# Altium PCB CenterBoard_Mega16.PcbDoc
Units mil, origin at the board's own origin, x right, y up, seen from the top; angles counter-clockwise.
Board outline 6000 x 4000 mil, 2 copper layers (Top Layer, Bottom Layer); 45 components, 52 nets, 229 pads, 41 vias.
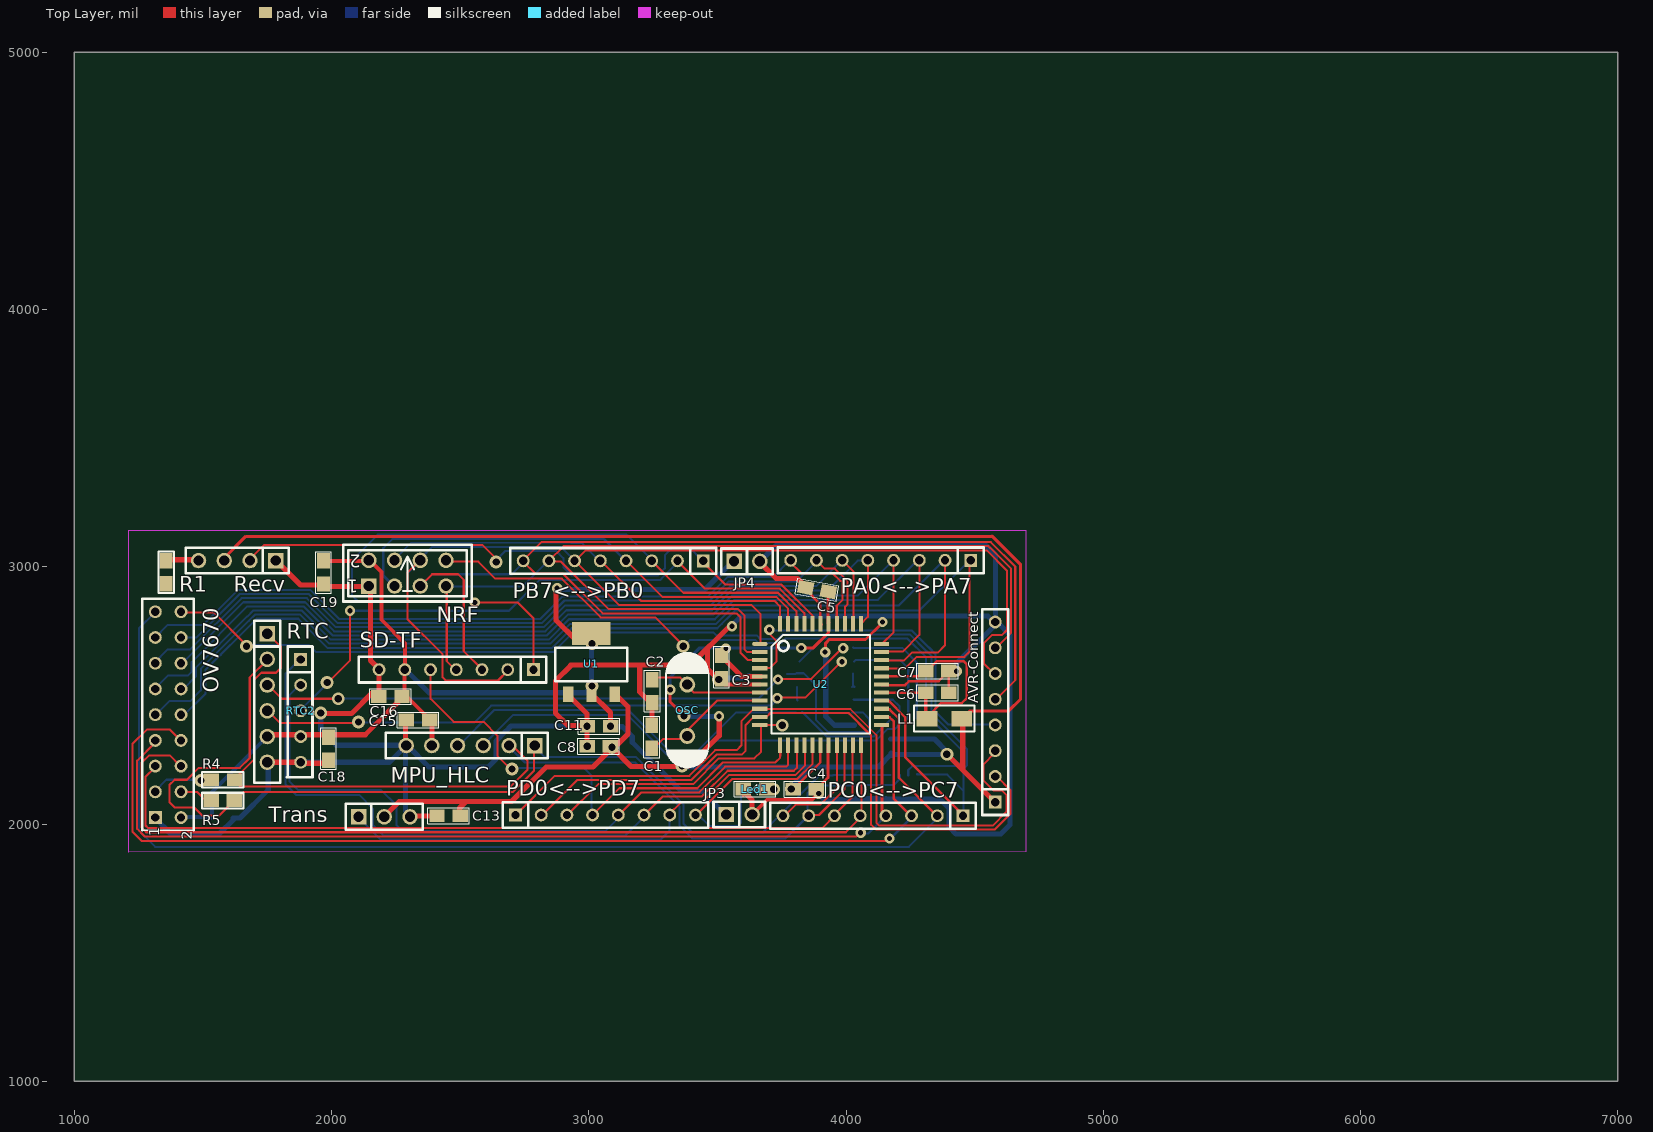
[diagram p0: Top Layer view]
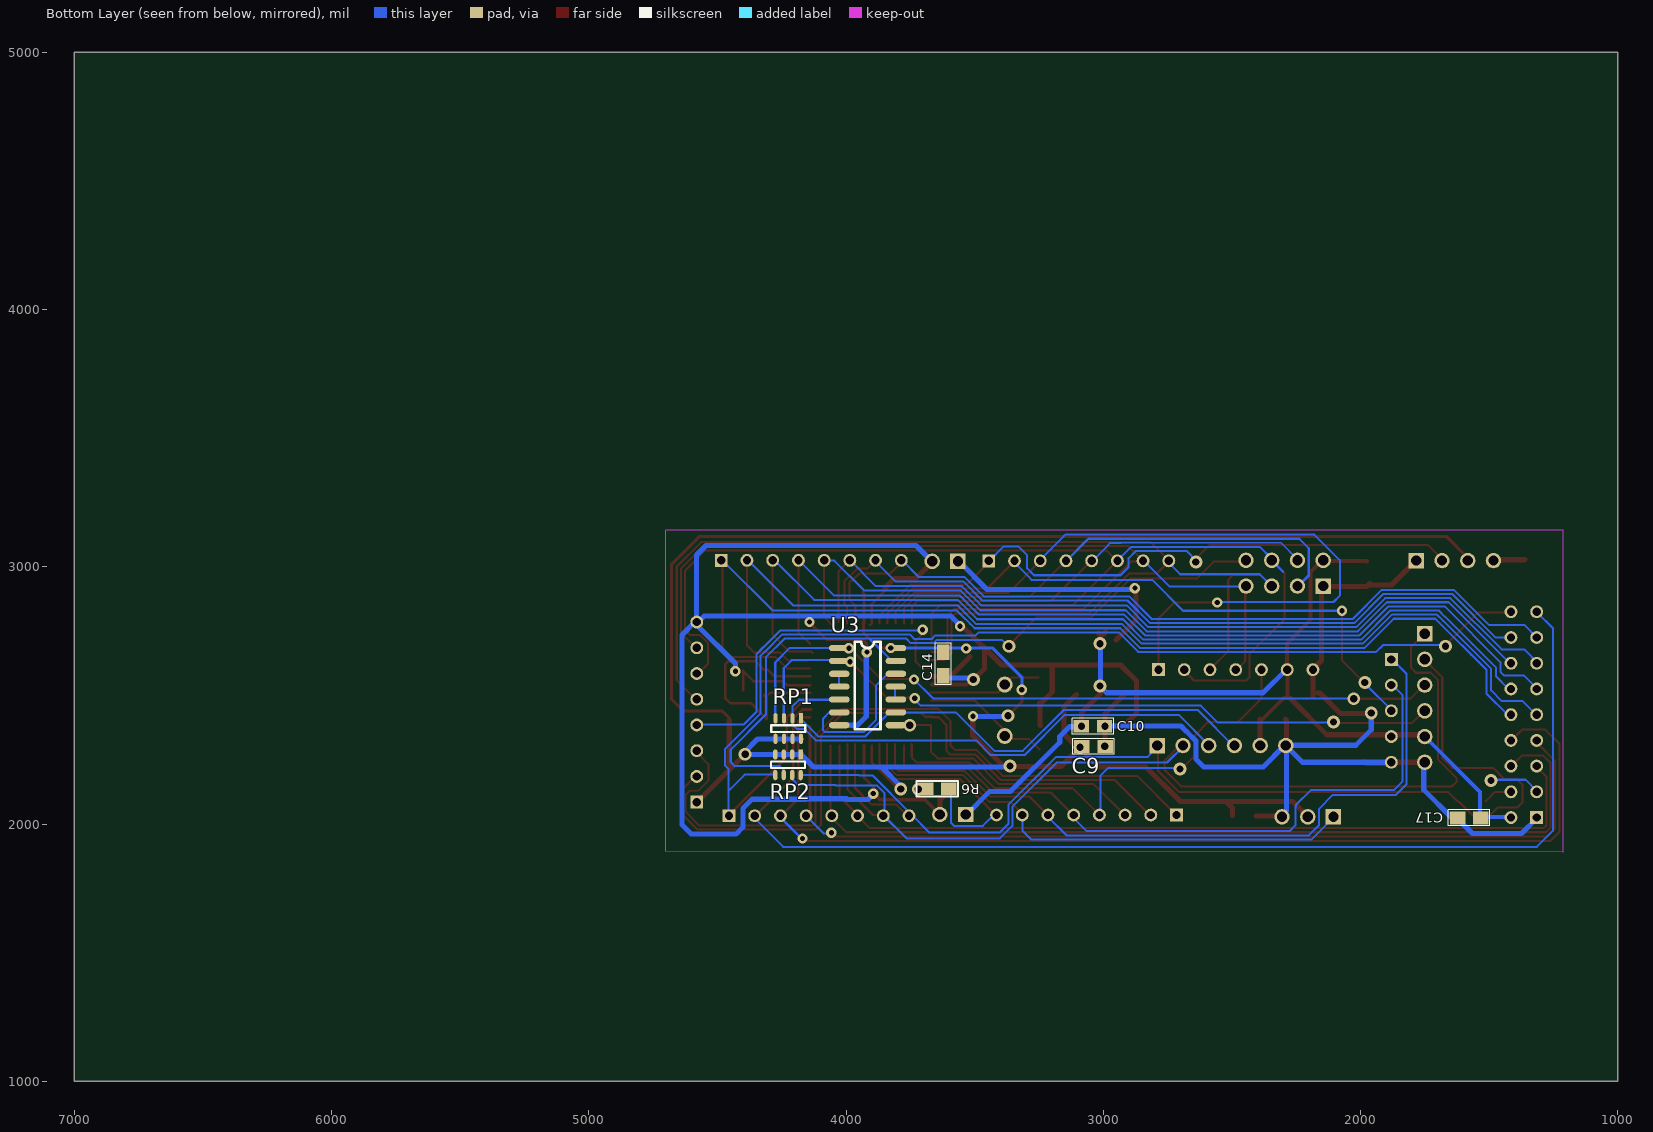
[diagram p1: Bottom Layer view, seen from below]

## Layer stack, top to bottom
Top Layer: signal copper 1.4
Dielectric: dielectric 12.6, FR-4, Dk 4.8
Bottom Layer: signal copper 1.4

## Board outline
1000,1000 7000,1000 7000,5000 1000,5000

## Design rules (kind name [scope] priority, off if disabled: settings)
Clearance [All] p1: gap=8
ComponentClearance [All] p1: gap=10 collisioncheckmode=3 verticalgap=10
PolygonConnect [All] p1: connectstyle=Relief reliefconductorwidth=10 reliefentries=4 polygonreliefangle="90 Angle"
RoutingVias [All] p1: holewidth=20 width=40 viastyle="Through Hole" minholewidth=20 minwidth=40 maxholewidth=28 maxwidth=50
SolderMaskExpansion [All] p1: expansion=4
TestPointUsage [All] p1: valid=0 allowmultiple=FALSE
Testpoint [All] p1: side=15 testpointundercomponent=TRUE minsize=40 maxsize=100 preferedsize=60 minholesize=0 maxholesize=40 preferedholesize=32 testpointgrid=1 style=1023 order=0-112345678
Width [All] p1: maxlimit=20 minlimit=6 preferedwidth=10 toplayer_prefwidth=8 bottomlayer_prefwidth=8 minimp=50.000000 maximp=50.000000 favimp=50.000000
18 further rules are at their usual default settings.

## Components (designator, comment, footprint, x,y, rotation, side; value= is the part's Value field where it differs from the comment)
AVR-Connect "8PIN" SIP8 4580,2085 r90 top
C1 "CAPA" RC100 3255,2374 r270 top
C2 "CAPA" RC100 3237,2481 r90 top
C3 "CAPA" RC100 3526,2645 r270 top
C4 "CAPA" RC100 3805,2145 r0 top
C5 "CAPA" RC100 3920,2895 r170 top
C6 "CAPA" RC100 4320,2520 r0 top
C7 "CAPA" RC100 4320,2605 r0 top
C8 "CAPA" RC100 3074,2292 r180 top
C9 "CAPA" RC100 3073,2311 r180 bottom
C10 "CAPA" RC100 3075,2390 r180 bottom
C11 "CAPA" RC100 3075,2370 r180 top
C13 "CAPA" RC100 2490,2022 r180 top
C14 "CAPA" RC100 3612,2657 r270 bottom
C15 "CAPA" RC100 2371,2394 r180 top
C16 "CAPA" RC100 2264,2486 r180 top
C17 "CAPA" RC100 1542,2014 r0 bottom
C18 "CAPA" RC100 1978,2258 r90 top
C19 "CAPA" RC100 1959,2943 r90 top
JP3 "2PIN" SIP2 3535,2037 r0 top
JP4 "2PIN" SIP2 3565,3021 r0 top
L1 "LH" 1206 4450,2410 r180 top
Led1 "LED" LED 3641,2051 r180 top
MPU_HLC "6PIN" SIP6 2790,2305 r180 top
NRF "NRF2401" NRF2401 2145,2925 r180 top
OSC "CRYSTAL" OSC200 3383,2542 r90 top
OV7670 "OV7670-K" SIP9X2 1315,2025 r90 top
PA0<-->PA7 "8PIN" SIP8 4485,3025 r180 top
PB7<-->PB0 "8PIN" SIP8 3445,3023 r180 top
PC0<-->PC7 "8PIN" SIP8 4455,2032 r180 top
PD0<-->PD7 "8PIN" SIP8 2715,2035 r0 top
R1 "RES2A" 0805 1362,2974 r90 top
R4 "RES2A" 0805 1573,2167 r0 top
R5 "RES2A" 0805 1582,2096 r180 top
R6 "RES2A" 0805 3650,2132 r180 bottom
Recv "4PIN" SIP4 1783,3024 r180 top
RP1 "RESPACK4" RN4 4175,2411 r270 bottom
RP2 "RESPACK4" RN4 4176,2270 r270 bottom
RTC "6PIN" SIP6 1750,2740 r270 top
RTC2 "5PIN" SIP5 1880,2640 r270 top
SD-TF "7PIN" SIP7 2785,2600 r180 top
Trans "3PIN" SIP3 2105,2028 r0 top
U1 "VOTAGE_V33" SOT-223 2920,2505 r0 top
U2 "ATMEGA16A_TQFP44" TQFP-44 3665,2700 r0 top
U3 "74HC08" SO-14 4026,2684 r180 bottom

## Footprints (in the part's own frame and the unit in brackets; to place one, negate y for a bottom-side part, rotate by r counter-clockwise, add the part's x,y. Pads: shape width x height; smd on the part's side, far side on the other; paste and mask are expansions set on the pad)
0805 [mil]
  rect 60x50 smd: 1(50,5) 2(-40,5)
  silkscreen extent -76,-26 85,36
1206 [mil]
  rect 80x60 smd: 1(0,0) 2(135,0)
  silkscreen extent -50,-50 185,50
LED [mil]
  rect 60x50 smd: A(-50,-85) K(40,-85)
  silkscreen extent -86,-116 75,-54
NRF2401 [mil]
  rect 60x60 hole 40: 1(0,0)
  round 60 hole 40: 2(0,-100) 3(-100,0) 4(-100,-100) 5(-200,0) 6(-200,-100) 7(-300,0) 8(-300,-100)
  silkscreen extent -400,-160 100,60
OSC200 [mil]
  round 62 hole 40: 1(0,0) 2(-200,0)
  silkscreen extent -323,-83 124,83
RC100 [mil]
  rect 60x50 smd: 1(-10,-10) 2(80,-10)
  silkscreen extent -45,-41 116,21
RN4 [mil]
  rect 40x16 smd: 1(0,0)
  oval 40x16 smd: 2(0,-33) 3(0,-66) 4(0,-99) 5(80,-99) 6(80,-66) 7(80,-33) 8(80,0)
  silkscreen extent 27,-116 53,16
SIP2 [mil]
  rect 60x60 hole 40: 1(0,0)
  round 60 hole 40: 2(100,0)
  silkscreen extent -50,-50 150,50
SIP3 [mil]
  rect 60x60 hole 40: 1(0,0)
  round 60 hole 40: 2(100,0) 3(200,0)
  silkscreen extent -50,-50 250,50
SIP4 [mil]
  rect 60x60 hole 40: 1(0,0)
  round 60 hole 40: 2(100,0) 3(200,0) 4(300,0)
  silkscreen extent -50,-50 350,50
SIP5 [mil]
  rect 50x50 hole 32: 1(0,0)
  round 50 hole 32: 2(100,0) 3(200,0) 4(300,0) 5(400,0)
  silkscreen extent -50,-53 459,47
SIP6 [mil]
  rect 60x60 hole 40: 1(0,0)
  round 60 hole 40: 2(100,0) 3(200,0) 4(300,0) 5(400,0) 6(500,0)
  silkscreen extent -50,-50 580,50
SIP7 [mil]
  rect 50x50 hole 32: 1(0,0)
  round 50 hole 32: 2(100,0) 3(200,0) 4(300,0) 5(400,0) 6(500,0) 7(600,0)
  silkscreen extent -50,-50 680,50
SIP8 [mil]
  rect 50x50 hole 32: 1(0,0)
  round 50 hole 32: 2(100,0) 3(200,0) 4(300,0) 5(400,0) 6(500,0) 7(600,0) 8(700,0)
  silkscreen extent -50,-50 750,50
SIP9X2 [mil]
  rect 50x50 hole 32: 1(0,0)
  round 50 hole 32: 2(0,-100) 3(100,0) 4(100,-100) 5(200,0) 6(200,-100) 7(300,0) 8(300,-100) 9(400,0) 10(400,-100) 11(500,0) 12(500,-100) 13(600,0) 14(600,-100) 15(700,0) 16(700,-100) 17(800,0) 18(800,-100)
  silkscreen extent -50,-150 850,50
SO-14 [mil]
  oval 80x24 smd: 1(0,0) 2(0,-50) 3(0,-100) 4(0,-150) 5(0,-200) 6(0,-250) 7(0,-300) 8(220,-300) 9(220,-250) 10(220,-200) 11(220,-150) 12(220,-100) 13(220,-50) 14(220,0)
  silkscreen extent 60,-315 160,25
SOT-223 [mil]
  rect 40x60 smd: 1(0,0) 2(90.55,0) 3(181.1,0)
  rect 150x90 smd: 4(90,235)
  silkscreen extent -50,50 230,180
TQFP-44 [mm]
  oval 1.5x0.4 smd: 1(0,0)
  rect 1.5x0.4 smd: 2(0,-0.8) 3(0,-1.6) 4(0,-2.4) 5(0,-3.2) 6(0,-4) 7(0,-4.8) 8(0,-5.6) 9(0,-6.4) 10(0,-7.2) 11(0,-8) 23(12,-8) 24(12,-7.2) 25(12,-6.4) 26(12,-5.6) 27(12,-4.8) 28(12,-4) 29(12,-3.2) 30(12,-2.4) 31(12,-1.6) 32(12,-0.8) 33(12,0)
  rect 0.4x1.5 smd: 12(2,-10) 13(2.8,-10) 14(3.6,-10) 15(4.4,-10) 16(5.2,-10) 17(6,-10) 18(6.8,-10) 19(7.6,-10) 20(8.4,-10) 21(9.2,-10) 22(10,-10) 34(10,2) 35(9.2,2) 36(8.4,2) 37(7.6,2) 38(6.8,2) 39(6,2) 40(5.2,2) 41(4.4,2) 42(3.6,2) 43(2.8,2) 44(2,2)
  silkscreen extent 1.13,-8.87 10.87,0.87

## Part data
U2: library part AT90S8535_TQFP44, "Atmel Microcontroller - Library created by carel..  <www.mpfreezone.com>"

## Via types
v1: diameter 50, hole 28, Top Layer to Bottom Layer, 22 vias
v2: diameter 40, hole 20, Top Layer to Bottom Layer, 19 vias

## Nets (pads, with @x,y where several pads share a name; then routed paths per layer and width w, separated by ;. In a path a pad name is that pad's centre, name@x,y a point inside that pad or via, vN(x,y) a via of type N, cw(c..) or ccw(c..) an arc to the next point about the centre after c; other vN are vias at no path point)
ANT: R1.2
AVCC: C6.1 C7.1 L1.2 U2.27 U2.29 | length 917.5
  Top Layer w10: U2.27@4140,2510 4295,2510 C6.1@4300,2505 ; U2.29@4140,2575 4280,2575 C7.1@4305,2600 ; C7.1@4310,2600 4320,2600 4353,2633 4457,2633 4470,2620 4470,2490 4450,2470 4370,2470 L1.2@4320,2420
  Top Layer w15: L1.2@4310,2410 4310,2495 C6.1@4315,2500
DRDY: MPU_HLC.3 RP1.2 U3.5 | length 2043.8
  Bottom Layer w8: MPU_HLC.3@2587,2304 2707,2424 3150,2424 3306,2268 3437,2268 3494,2325 4117,2325 4162,2370 4191,2370 4208,2387 4208,2457 4182,2483 4031,2483 U3.5@4030,2484
GND: AVR-Connect.8 C1.1 C2.1 C3.2 C4.2 C5.2 C6.2 C7.2 C8.2 C9.2 C10.2 C11.2 C13.2 C14.2 C15.2 C16.2 C17.2 C18.1 C19.1 JP3.2 JP4.2 Led1.K MPU_HLC.6 NRF.1 OV7670.1 Recv.1 RTC2.5 RTC.6 SD-TF.7 Trans.3 U1.1 U2.6 U2.18 U2.28 U2.39 U3.7 | length 12423.3
  Top Layer w10: 3601,2110 Led1.K@3601,2134 ; C5.2@3840,2915 3899.54,2855.46 3899.54,2780.46 U2.39@3905,2775 ; C4.2@3880,2130 C4.2@3880.5,2130.5 ; C4.2 3930,2180 U2.18@3930,2306.3 ; U2.28@4140,2540 4230,2540 4245,2555 4360,2555 C7.2 C6.2@4400,2520
  Top Layer w12: v2@3921,2667 3921,2703 3935,2717 4076,2717 v2@4136,2777
  Top Layer w15: C3.2@3514,2561 3532,2543 U2.6@3666,2543 ; JP3.2@3634,2036 3692.5,2094.5 3868.5,2094.5 3885,2111 C4.2@3885,2132
  Top Layer w20: RTC.6 1881,2240 RTC2.5@1884,2237 ; Recv.1@1786,3022 1879,2929 C19.1@1969,2929 ; RTC2.5@1878,2236 1978,2236 C18.1@1985,2243 ; v1@1958,2429 2077.43,2429 2157.43,2509 C16.2@2166,2509 ; C19.1@1964,2935 1976,2923 NRF.1@2150,2923 ; NRF.1@2152,2923 2152,2636 SD-TF.7@2188,2600 ; C16.2 SD-TF.7@2184,2601 ; MPU_HLC.6@2287,2305 2287,2402 C15.2@2292,2407 ; Trans.3@2315,2033 2317,2031 C13.2@2406,2031 ; 2870,2555.4 2932.6,2618 ; 2870,2556 2870,2432 2919,2383 2989,2383 2990,2384 C11.2@2986,2384 ; U1.1@2918.5,2503.5 2993,2429 C11.2@2993,2382 ; 2930,2618 3396,2618 3550,2772 3558,2772 3559,2771 3560,2771 v2@3561,2770 ; C8.2@2993,2302 v1(2993,2380) ; 3198,2618 3198,2513 3240,2471 C2.1 ; C1.1@3244,2383 3246,2385 C2.1@3246,2467 ; 3461,2684 3461,2604 C3.2@3502,2563 ; Led1.K@3600,2129 3634,2095 JP3.2@3634,2037 ; JP4.2@3667,3015 3668,3015 3728,2955 3811,2955 C5.2@3848,2918
  Bottom Layer w8: SD-TF.7@2188,2605 SD-TF.7@2188,2607
  Bottom Layer w20: OV7670.1@1308,2022 1315,2022 1374,1963 1565,1963 C17.2@1620,2018 ; OV7670.1@1315,2027 OV7670.1@1318,2027 ; C17.2@1618,2023 1644,2023 1754,2133 1754,2237 RTC.6@1750,2241 ; RTC2.5 2225,2240 MPU_HLC.6@2292,2307 ; v1(1958,2431) 1958,2366 2018,2306 MPU_HLC.6@2294,2306 ; MPU_HLC.6@2286,2305 2295,2305 2378,2222 2609,2222 2639,2252 2639,2323 2675,2359 2676,2359 2698,2381 2993,2381 C10.2@2994,2380 ; MPU_HLC.6@2298,2287 2298,2297 2287,2308 2287,2050 Trans.3@2300,2037 ; v1@3498,2567 3612,2567 C14.2 ; v2@3555,2771 3592,2808 4552,2808 AVR-Connect.8@4579,2781 ; JP4.2@3662,3017 3728,3083 4544,3083 4581,3046 4581,2775 4430,2624 4430,2595 v2@4431,2594 ; v2@3890,2120 3915,2095 3998,2095 ; v2@3920,2672 3921,2671 3921,2418 3955,2384 U3.7@4032,2384 ; 3997,2096 3999,2098 4156,2098 ; 4156,2096 4365,2096 4401,2060 4401,1987 4427,1961 4602,1961 4638,1997 4638,2735 4588,2785 AVR-Connect.8@4581,2785
  other v1: 2994,2302 3505,2562
  other v2: 3894,2118 4430,2594 3919,2668 3557,2769 4142,2785
INT2401: NRF.8 RP2.6 U3.13 | length 2882.6
  Top Layer w8: NRF.8@2444,3020 2571,3020 2637,2954 2895,2954 3046,2803 ; 3047,2803 3259,2803 v1@3368,2694
  Bottom Layer w8: v1@3370,2692 3394,2716 3646,2716 ; 3647,2716 3660,2703 3748,2703 3766,2721 4238,2721 4311.5,2647.5 ; U3.13@3819,2631 3909,2721 ; RP2.6@4242,2188 4242,2210 4257,2225 4432,2225 4448,2241 4448,2289 4311,2426 4311,2647
  other v1: 3367,2691
INT6050: MPU_HLC.4 RP1.1 U3.9 | length 1921.2
  Bottom Layer w8: MPU_HLC.4@2488,2299 2632,2443 3153.63,2443 3312.63,2284 3423,2284 3573,2434 U3.9 ; U3.9@3829,2436 3924,2341 4109,2341 ; 4108,2341 RP1.1@4176,2409
INTA: RP1.3 RTC.4 U3.2 | length 2771.9
  Top Layer w8: RTC.4@1751,2437 1756,2437 1801,2392 2102,2392 v1@2105,2395 ; v2@3735,2492 3843,2492 v2@3983,2632
  Bottom Layer w8: v1@2108,2395 2109,2394 2556,2394 ; 2555,2394 2621,2460 3709,2460 3734,2485 v2@3734,2489 ; U3.2@4032,2632 4037,2637 4211,2637 4242,2606 RP1.3@4242,2408
  other v1: 2105,2396
  other v2: 3733,2489 3984,2631
INTB: RP1.4 RTC.3 U3.1 | length 2841.9
  Top Layer w8: RTC.3 1754,2540 1807,2487 2028,2487 v1@2031,2490 ; v2@3735,2564 3865,2564 v2@3989,2688
  Bottom Layer w8: v1@2026,2488 3661,2488 v2@3738,2565 ; U3.1@4028,2687 4030,2685 4218,2685 4275,2628 RP1.4@4275,2411
  other v1: 2026,2487
  other v2: 3736,2562 3989,2683
INTR: U3.3 U3.4 | length 53.7
  Bottom Layer w8: U3.4@4024,2533 4027,2536 U3.3@4027,2584 ; U3.4@4032,2533 U3.4@4033,2534
INTRS: U3.10 U3.11 | length 53.2
  Bottom Layer w8: U3.11@3809,2533 3809,2484 U3.10@3812,2481
INTS: U3.6 U3.12 | length 611.2
  Bottom Layer w8: U3.12@3770,2583 U3.12@3803,2583 ; U3.12@3808,2587 3809,2586 3835,2586 3883.63,2537.37 3883.63,2404 3930.63,2357 3933,2357 4082,2357 4089,2364 4089,2410 4065,2434 U3.6@4024,2434
NetC1_2: C1.2 OSC.2 U2.8 | length 502.7
  Top Layer w8: C1.2@3248.5,2290.5 3288,2330 OSC.2@3382,2330 ; OSC.2@3370,2350 3500,2480 U2.8@3669,2480
NetC2_2: C2.2 OSC.1 U2.7 | length 443.5
  Top Layer w8: C2.2@3251,2569 3356,2569 OSC.1 ; OSC.1@3382,2537 3407,2512 U2.7@3672,2512
NetLed1_A: Led1.A R6.2
  other v1: 3719,2135
NetOV7670_3: OV7670.3 R4.2 | length 206.2
  Top Layer w8: OV7670.3 OV7670.3@1328,2125
  Bottom Layer w8: OV7670.3@1314,2128 1358,2172 v1@1489,2172
  other v1: 1493,2169
NetOV7670_4: OV7670.4 R5.1 | length 116.9
  Top Layer w8: OV7670.4@1411,2125 1477,2125 R5.1@1513,2089
NetR1_1: R1.1 Recv.4 | length 125.4
  Top Layer w20: R1.1@1361,3028 1362,3027 Recv.4@1486,3027
PA0: OV7670.15 PA0<-->PA7.8 U2.37 | length 3081.1
  Top Layer w8: PA0<-->PA7.8@3782,3020 3828,2974 3948,2974 3977,2945 3981,2945 3987,2939 3987,2872 3964,2849 3964,2794 U2.37@3962,2792
  Bottom Layer w8: OV7670.15@1316,2727 1362,2773 1500.12,2773 1637.12,2910 1917.39,2910 2030.39,2797 2810.98,2797 2898.98,2885 3464.11,2885 3540.11,2961 3718,2961 3780,3023 PA0<-->PA7.8@3785,3023
PA1: OV7670.16 PA0<-->PA7.7 U2.36 | length 3005.2
  Top Layer w8: PA0<-->PA7.7@3886,3025 3918,2993 3957,2993 4005,2945 4005,2853 3996,2844 U2.36@3996,2780
  Bottom Layer w8: OV7670.16@1417,2726 1417.37,2725.63 1475.37,2725.63 1643.75,2894 1910.76,2894 2023.76,2781 2817.61,2781 2905.61,2869 3470.74,2869 3544.74,2943 3808,2943 3884,3019 PA0<-->PA7.7@3884,3021
PA2: OV7670.13 PA0<-->PA7.6 U2.35 | length 3193.5
  Top Layer w8: PA0<-->PA7.6 4030,2980 U2.35@4030,2785
  Bottom Layer w8: OV7670.13@1309,2624 1363.63,2678.63 1451,2678.63 1650.37,2878 1904.14,2878 2017.14,2765 2824.24,2765 2909.24,2850 3474.37,2850 3549.37,2925 3884,2925 3982,3023 PA0<-->PA7.6@3985,3023
PA3: OV7670.14 PA0<-->PA7.5 U2.34 | length 3178.5
  Top Layer w8: U2.34@4055,2775 4085,2805 PA0<-->PA7.5@4085,3020
  Bottom Layer w8: OV7670.14@1422,2627 1657,2862 1897.51,2862 2010.51,2749 2830.86,2749 2912.86,2831 3477.99,2831 3553.99,2907 3928,2907 4045,3024 PA0<-->PA7.5@4085,3024
PA4: OV7670.11 PA0<-->PA7.4 U2.33 | length 3531.1
  Top Layer w8: U2.33@4140,2700 4185,2745 PA0<-->PA7.4@4185,3020
  Bottom Layer w8: OV7670.11@1314,2527 1364,2577 1441,2577 1456,2592 1456,2629 1673,2846 1890.88,2846 2003.88,2733 2578,2733 ; 2579,2733 2837.49,2733 2919.49,2815 3485,2815 3526,2856 ; 3525.81,2856.19 3558.62,2889 4047,2889 PA0<-->PA7.4@4185,3027
PA5: OV7670.12 PA0<-->PA7.3 U2.32 | length 3657.2
  Top Layer w8: U2.32@4130,2665 4135,2670 4220,2670 4285,2735 PA0<-->PA7.3
  Bottom Layer w8: OV7670.12@1423,2524 1473,2574 1473,2607 ; 1472.69,2607.31 1564,2698.63 1564,2699 1671,2806 1671.75,2806 1695.75,2830 1884.25,2830 1997.25,2717 2844.12,2717 2923.12,2796 3490,2796 3564,2870 4123,2870 4127,2874 4127,2875 4274,3022 PA0<-->PA7.3@4286,3022
PA6: OV7670.9 PA0<-->PA7.2 U2.31 | length 4054.7
  Top Layer w8: U2.31@4145,2635 4225,2635 4256,2666 4356,2666 4385,2695 PA0<-->PA7.2@4385,3020
  Bottom Layer w8: OV7670.9@1314,2422 1369.63,2477.63 1450,2477.63 1492,2519.63 1492,2604 1678,2790 1678.37,2790 1702.37,2814 1877.63,2814 1990.63,2701 2850.75,2701 2926.75,2777 3493.63,2777 3566.63,2850 4206,2850 4381,3025 PA0<-->PA7.2@4386,3025
PA7: OV7670.10 PA0<-->PA7.1 U2.30 | length 4177.7
  Top Layer w8: U2.30@4140,2605 4230,2605 4275,2650 4460,2650 4480,2670 4480,3020 PA0<-->PA7.1
  Bottom Layer w8: OV7670.10@1428,2424 1510,2506 1510,2599 1709,2798 1871,2798 1984,2685 2608.37,2685 ; 1569,2658 1570,2658 ; 2609,2685 2857.37,2685 2933.37,2761 3500.25,2761 3569.25,2830 4285,2830 4479,3024 PA0<-->PA7.1@4484,3024 ; 3516.25,2777 3517,2777
PB0: PB7<-->PB0.1 Recv.2 U2.40 | length 2554.3
  Top Layer w8: Recv.2@1677,3024 1738,3085 2586,3085 2642,3029 v1@2642,3020 ; Recv.2@1684,3028 Recv.2@1684,3035 ; Recv.2@1687,3027 Recv.2@1687,3028 ; PB7<-->PB0.1@3444,3018 3531,2931 3749,2931 3870,2810 U2.40@3870,2780
  Bottom Layer w8: v1@2637,3022 2676.5,3061.5 2872.5,3061.5 2901,3033 2901,2999 2933,2967 3269,2967 3296,2994 3296,3044 3331,3079 3387,3079 PB7<-->PB0.1@3444,3022
  other v1: 2640,3019
PB1: PB7<-->PB0.2 RTC2.3 U2.41 | length 2446.1
  Top Layer w8: v1@1979,2544 2072,2637 v2(2072,2829) ; PB7<-->PB0.2@3345,3022 3452,2915 3742.37,2915 3838,2819.37 U2.41@3838,2782 ; U2.41@3840,2780 U2.41@3840,2782
  Bottom Layer w8: RTC2.3@1878.5,2441.5 v1@1985,2548 ; v2@2074,2829 2690,2829 2810,2949 3279,2949 3282,2952 3282,2953 3344,3015 PB7<-->PB0.2@3344,3023
  other v1: 1983,2550
PB2: PB7<-->PB0.3 SD-TF.1 U2.42 | length 3028.3
  Top Layer w8: v2(2557,2861) 2724,2861 2785,2800 2785,2599 SD-TF.1@2788,2596 ; PB7<-->PB0.3@3244,3023 3368,2899 3735.75,2899 3807,2827.75 U2.42@3807,2781 ; U2.42@3805,2780 U2.42@3805,2781
  Bottom Layer w8: v2@2558,2863 2105,2863 2080,2888 2080,3026 2179,3125 3147,3125 PB7<-->PB0.3@3248,3024 ; 3151,3121 3152,3121
PB3: NRF.3 PB7<-->PB0.4 U2.43 | length 2262.1
  Top Layer w8: PB7<-->PB0.4@3147,3022 3286,2883 3729.12,2883 3775,2837.12 U2.43@3775,2780
  Bottom Layer w8: 2201,3049 2201,2968 NRF.3@2245,2924 ; NRF.3@2243,2923 2242,2923 2201,2964 2201,3072 2238,3109 3057,3109 3060,3106 3061,3106 3143,3024 PB7<-->PB0.4@3145,3024 ; 2905.63,3109 2979.63,3109 ; 3061,3105 PB7<-->PB0.4@3147,3019
PB4: NRF.4 PB7<-->PB0.5 U2.44 | length 1691.2
  Top Layer w8: PB7<-->PB0.5@3049,3022 3204,2867 3722.49,2867 3743,2846.49 U2.44@3743,2779 ; U2.44@3743,2780 U2.44@3745,2780
  Bottom Layer w7: NRF.4@2246,3030 2309,3093 2932,3093
  Bottom Layer w8: 2932,3093 2973,3093 2979,3087 2979,3086 3039,3026 PB7<-->PB0.5@3043,3026 ; PB7<-->PB0.5@3041.5,3024.5 PB7<-->PB0.5@3044,3022
PB5: AVR-Connect.6 NRF.6 PB7<-->PB0.6 SD-TF.2 U2.1 | length 4658
  Top Layer w8: NRF.6@2342,3024 2295,2977 2295,2797 2432,2660 2432,2570 2444,2558 2647,2558 SD-TF.2@2685,2596 ; PB7<-->PB0.6@2947,3023 2988,3064 4547,3064 4626,2985 4626,2754 4607,2735 4569,2735 4536,2702 4536,2624 4574,2586 AVR-Connect.6@4581,2586 ; PB7<-->PB0.6@2948,3021 3118,2851 3633,2851 3668,2816 U2.1@3668,2700
  Bottom Layer w8: 2301,2980 NRF.6@2344,3023 ; NRF.6@2344,3020 NRF.6@2370,3020 ; NRF.6@2348,3034 2391.5,3077.5 2891.5,3077.5 2943,3026 PB7<-->PB0.6@2945,3026
PB6: AVR-Connect.7 NRF.7 PB7<-->PB0.7 SD-TF.4 U2.2 | length 4021.9
  Top Layer w8: NRF.7@2448,2923 2448,2633 SD-TF.4@2484,2597 ; PB7<-->PB0.7@2844,3023 2847,3020 2892,3020 3077,2835 3581,2835 3606,2810 3606,2678 3616,2668 U2.2@3668,2668 ; PB7<-->PB0.7 2902,3080 4553.63,3080 4559.63,3074 ; 4560,3074 4642,2992 4642,2743 4582,2683 AVR-Connect.7@4581,2683
  Bottom Layer w8: NRF.7@2448,2923 2742,2923 PB7<-->PB0.7@2846,3027
PB7: AVR-Connect.5 NRF.5 PB7<-->PB0.8 SD-TF.3 U2.3 | length 4740.4
  Top Layer w8: NRF.5@2347,2927 2391,2971 2492,2971 2514,2949 2514,2672 2583,2603 SD-TF.3@2583,2597 ; PB7<-->PB0.8@2744,3022 2792,2974 2899,2974 3054,2819 3574.37,2819 3590,2803.37 3590,2665 3617,2638 U2.3@3667,2638 ; PB7<-->PB0.8@2744,3024 2816,3096 4563,3096 4658,3001 4658,2559 4582,2483 AVR-Connect.5@4581,2483 ; U2.3 U2.3@3669,2637
  Bottom Layer w8: NRF.5@2344,2921 NRF.5@2345,2922 ; NRF.5@2344,2927 2348,2927 2392,2971 2701,2971 PB7<-->PB0.8@2747,3017 ; SD-TF.3@2583,2599 SD-TF.3@2583,2622
PC0: MPU_HLC.1 PC0<-->PC7.8 R5.2 RP2.8 RTC.2 U2.19 | length 4515.4
  Top Layer w8: R5.2@1617,2086 1564,2033 1497,2033 1466,2064 1390,2064 1370,2084 1370,2152 1390,2172 1438,2172 1484,2218 1643.37,2218 1682,2256.63 1682,2570 RTC.2@1749,2637 ; R5.2@1621,2087 1658,2124 2704,2124 2787,2207 2787,2295 MPU_HLC.1@2784,2298 ; PC0<-->PC7.8@3755,2026 3804,2075 3900,2075 3965,2140 U2.19@3965,2310 ; 3937,2112 3937,2113
  Bottom Layer w8: RTC.2@1745,2638 RTC.2@1747,2638 ; MPU_HLC.1@2788,2300 2827,2261 3182,2261 3273,2170 3274,2170 3369,2075 3369,2000 3402,1967 3676,1967 3743,2034 PC0<-->PC7.8@3745,2034 ; MPU_HLC.1@2792,2305 MPU_HLC.1@2800,2305 ; PC0<-->PC7.8@3752,2044 3897,2189 3949,2189 ; 3949,2190 RP2.8@4173,2190
PC1: MPU_HLC.2 PC0<-->PC7.7 R4.1 RP2.7 RTC.1 U2.20 | length 4237.8
  Top Layer w8: R4.1@1624,2166 1644,2146 2697,2146 2761,2210 2761,2247 MPU_HLC.2@2699,2309 ; R4.1@1626,2172 1626,2178 1698,2250 1698,2559 1727,2588 1784,2588 1803,2607 1803,2689 RTC.1@1750,2742 ; PC0<-->PC7.7@3855,2030 3860,2035 3895,2035 3995,2135 U2.20@3995,2310
  Bottom Layer w8: MPU_HLC.2 2690,2301 2752,2239 3181.37,2239 3353,2067.37 3353,1993 3402,1944 3765,1944 PC0<-->PC7.7@3856,2035 ; MPU_HLC.2@2692,2305 MPU_HLC.2@2692,2306 ; PC0<-->PC7.7@3845,2034 3849.63,2038.63 3849.63,2119 3880.63,2150 4041,2150 ; 4041,2151 4185,2151 4209,2175 RP2.7
PC2: OV7670.5 PC0<-->PC7.6 U2.21 | length 3248.8
  Top Layer w8: OV7670.5@1314,2224 1314,2221 1277,2184 1277,1994 1287,1984 3908,1984 PC0<-->PC7.6@3957,2033 ; PC0<-->PC7.6@3955,2035 4025,2105 U2.21@4025,2305
PC3: OV7670.6 PC0<-->PC7.5 U2.22 | length 3539.9
  Top Layer w8: 1260.63,1995 1260.63,1987 1279.63,1968 3999,1968 PC0<-->PC7.5@4059,2028 ; 1261,1995 1261,2237 1291,2267 1371,2267 1413,2225 OV7670.6 ; PC0<-->PC7.5@4060,2030 U2.22@4060,2305
PC4: OV7670.7 PC0<-->PC7.4 U2.23 | length 3673.8
  Top Layer w8: OV7670.7@1313,2323 1313,2315 1244,2246 1244,2031 1244,1981 1273,1952 4041,1952 v2@4055,1966
  Top Layer w10: U2.23@4140,2380 4140,2050 PC0<-->PC7.4@4155,2035
  Bottom Layer w8: v2@4060,1963 4087,1963 PC0<-->PC7.4@4155,2031
  other v2: 4057,1966
PC5: OV7670.8 PC0<-->PC7.3 U2.24 | length 4113.5
  Top Layer w8: OV7670.8@1409,2324 OV7670.8@1416,2324 ; OV7670.8@1413,2326 1372,2367 1282,2367 1226,2311 1226,1971 1263,1934 4160,1934 v2@4172,1946
  Top Layer w10: U2.24@4140,2415 4170,2415 4185,2400 4185,2100 PC0<-->PC7.3@4255,2030
  Bottom Layer w10: v2@4171,1942 4255,2026 PC0<-->PC7.3@4255,2030
  other v2: 4169,1944
PC6: OV7670.17 PC0<-->PC7.2 U2.25 | length 4590.1
  Top Layer w10: OV7670.17@1308,2823 OV7670.17@1313,2823 ; U2.25@4135,2445 4170,2445 4205,2410 4205,2180 PC0<-->PC7.2@4355,2030
  Bottom Layer w8: OV7670.17@1312,2822 1252,2762 1252,1973 1314,1911 4244,1911 PC0<-->PC7.2@4355,2022
  Bottom Layer w10: PC0<-->PC7.2@4355,2022 PC0<-->PC7.2
PC7: OV7670.18 PC0<-->PC7.1 RP2.5 U2.26 | length 4565.1
  Top Layer w8: OV7670.18@1411,2823 1542,2823 v1@1671,2694
  Top Layer w10: U2.26@4140,2480 4165,2480 4230,2415 4230,2260 PC0<-->PC7.1@4455,2035
  Bottom Layer w8: v1@1661,2696 1912,2696 1939,2669 2864,2669 2940,2745 3484,2745 3497,2732 3554,2732 ; 3554,2733 3652.63,2733 3666.63,2719 3734,2719 3752,2737 4248,2737 4315,2670 4316,2670 4332,2654 4332,2430 4471,2291 4471,2228 4456,2213 4456,2100 ; RP2.5@4276,2194 RP2.5@4280,2194 ; RP2.5@4277,2192 4394,2192 4456,2130 ; PC0<-->PC7.1@4456,2032 4457,2033 4457,2100
  other v1: 1670,2691
PD0: AVR-Connect.3 PD0<-->PD7.1 U2.9 | length 2899.6
  Top Layer w7: U2.9@3667,2449 3669,2447 4017,2447 4118,2346 4118,2005 4129,1994 4570,1994 4623,2047 4623,2114 4608,2129 4574,2129 4535,2168 4535,2233 4577,2275 AVR-Connect.3@4577,2286 ; 4118,2014 4118,2052.11
  Top Layer w8: PD0<-->PD7.1@2715,2034 2868,2187 3391,2187 3491,2287 3575,2287 3593,2305 3593,2399 3642,2448 U2.9@3669,2448 ; AVR-Connect.3@4582,2283 AVR-Connect.3@4584,2283
PD1: AVR-Connect.2 PD0<-->PD7.2 U2.10 | length 2801.4
  Top Layer w8: PD0<-->PD7.2@2816,2031 2956,2171 3398.63,2171 3498.63,2271 3596,2271 3610,2285 3610,2385 3640,2415 U2.10@3665,2415 ; U2.10@3664,2417 3692.03,2417 3706.53,2431.5 4010.58,2431.5 4098,2344.08 4098,1997 4117,1978 4578,1978 4581,1981 4639,2039 4639,2132 4586,2185 AVR-Connect.2@4582,2185 ; 4010,2430 4083,2357 ; 4098,1995.81 4098,2057 ; AVR-Connect.2@4582,2182 AVR-Connect.2@4582,2183
PD2: PD0<-->PD7.3 U2.11 U3.8 | length 1045.6
  Top Layer w8: PD0<-->PD7.3@2915,2032 2915,2033 3037,2155 3405.63,2155 3505.63,2255 3644,2255 3670,2281 U2.11@3670,2385 ; U2.11@3673,2383 3675,2385 v1@3755,2385
  other v1: 3752,2384
PD3: PD0<-->PD7.4 SD-TF.5 U2.12 | length 1995
  Top Layer w8: SD-TF.5@2383,2600 2385,2598 2385,2487 2475,2397 2591,2397 2645,2343 2645,2265 v1@2699,2211 ; PD0<-->PD7.4@3014,2034 3119,2139 3421.63,2139 3521.63,2239 3725,2239 3744,2258 U2.12@3744,2307 ; 3745,2265 U2.12@3745,2310
  Bottom Layer w8: v1@2704,2217 2982,2217 3011,2188 3011,2041 PD0<-->PD7.4@3018,2034 ; PD0<-->PD7.4@3011,2036 PD0<-->PD7.4@3017,2030 ; PD0<-->PD7.4@3014,2033 PD0<-->PD7.4@3014,2039
  other v1: 2702,2214
PD4: PD0<-->PD7.5 RTC2.2 U2.13 | length 2654.1
  Top Layer w8: RTC2.2@1880,2534 RTC2.2@1880,2538 ; PD0<-->PD7.5@3115,2030 PD0<-->PD7.5@3116.5,2031.5 ; PD0<-->PD7.5@3116,2032 3115,2033 3205,2123 3430,2123 3530,2223 3768,2223 3775,2230 U2.13@3775,2305
  Bottom Layer w8: RTC2.2@1878,2543 1837,2502 1837,2165 1869,2133 2192,2133 2251,2074 2251,2069 2253,2067 2253,1995 2276,1972 3064,1972 3117,2025 PD0<-->PD7.5@3117,2033
PD5: PD0<-->PD7.6 RTC2.1 U2.14 | length 2822.4
  Top Layer w8: PD0<-->PD7.6@3214,2033 3288,2107 3440,2107 3540,2207 3797.37,2207 3810,2219.63 U2.14@3810,2310
  Bottom Layer w8: RTC2.1@1877,2640 1821,2584 1821,2154 1862,2113 2107,2113 2161,2059 2161,1996 2201,1956 3143,1956 3217,2030 PD0<-->PD7.6@3217,2034
PD6: PD0<-->PD7.7 Trans.1 U2.15 | length 2015.8
  Top Layer w8: Trans.1@2107,2025 Trans.1@2107,2027 ; PD0<-->PD7.7@3311,2037 3359,2085 3440.63,2085 3546.63,2191 3804,2191 3840,2227 U2.15@3840,2310
  Bottom Layer w8: Trans.1@2102,2028 2190,1940 3281,1940 3314,1973 PD0<-->PD7.7@3314,2034
PD7: PD0<-->PD7.8 R6.1 U2.16 | length 949.8
  Top Layer w8: PD0<-->PD7.8@3416,2035 3417.63,2035 3557.63,2175 3810.96,2175 3870,2234.04 U2.16@3870,2310
  Bottom Layer w8: PD0<-->PD7.8@3416,2037 3424,2037 3468,1993 3580,1993 3592,2005 3592,2139 R6.1@3595,2142
RST: AVR-Connect.4 U2.4 | length 1356.3
  Top Layer w8: U2.4@3666,2606 3704,2606 3729,2631 3729,2712 v2@3700,2741
  Bottom Layer w8: v2@3702,2753 4254.63,2753 4321.63,2686 4322.63,2686 4348,2660.63 4348,2436.63 4398,2386.63 4573.37,2386.63 AVR-Connect.4@4578,2382
  other v2: 3702,2755
VCC: AVR-Connect.1 C3.1 C4.1 C5.1 C8.1 C9.1 C13.1 C14.1 L1.1 Recv.3 RP1.5 RP1.6 RP1.7 RP1.8 RP2.1 RP2.2 RP2.3 RP2.4 Trans.2 U1.3 U2.5 U2.17 U2.38 U3.14 | length 9265.7
  Top Layer w10: C4.1@3800,2140 3900,2240 U2.17@3900,2305 ; U2.38@3930,2780 3930,2895 C5.1@3935,2900
  Top Layer w12: Recv.3 1583,3034 1667,3118 4568,3118 ; v2@3315,2520 3315,2476 v1(3370,2421) ; v2@3827,2685 3873,2685 3932,2744 3932,2783 U2.38@3933,2784 ; L1.1@4453,2411 4482,2440 4633,2440 4679,2486 4679,3008 4568,3119
  Top Layer w20: Trans.2@2204.5,2028.5 2263,2087 2523,2087 ; C13.1@2498,2034 2498,2062 2524,2088 ; 2524,2087 2700,2087 2835,2222 3016,2222 C8.1@3090,2296 ; C8.1@3089,2299 3164,2224 v1@3358,2224 ; C8.1@3098,2296 3152,2350 3152,2456 U1.3@3104,2504 ; v1@3364,2226 3389,2226 3506,2343 ; 3507,2342 3507,2420 v2@3508,2421 ; C3.1@3518,2650 3594,2574 U2.5@3670,2574 ; v1@4393,2271 AVR-Connect.1@4576,2088 ; 4454,2210 4454,2268 ; 4454,2269 L1.1@4454,2403
  Bottom Layer w12: v2@3315,2522 3315,2569 3431,2685 v2@3531,2685 ; v2@3515,2683 v2@3530,2683 ; v2@3531,2684 U3.14
  Bottom Layer w20: v1@3362,2222 4126,2222 4174,2270 RP2.1@4179,2270 ; v1@3370,2418 v2@3506,2418 ; v1@3787,2132 3787,2147 3862,2222 ; RP1.8@4173,2331 4174,2330 4344,2330 4391,2283 v1@4391,2275 ; RP2.1@4175,2275 4180,2270 v1@4393,2270 ; RP2.1@4176,2267 RP2.1@4177,2268 ; v1@4393,2267 v1@4395,2269
  other v1: 3787,2136 3362,2226 4392,2271 3090,2298
  other v2: 3506,2419 3317,2522 3533,2682 3826,2684
VCC33: C10.1 C11.1 C15.1 C16.1 C17.1 C18.2 C19.2 JP3.1 JP4.1 MPU_HLC.5 NRF.2 OV7670.2 RTC2.4 RTC.5 SD-TF.6 U1.2 U1.4 | length 4815.1
  Top Layer w15: C19.2@1974,3021 1976,3023 NRF.2@2149,3023 ; NRF.2@2147,3027 2194,2980 2194,2794 2286,2702 2286,2607 SD-TF.6@2288,2605 ; C16.1@2283,2500 2284,2501 SD-TF.6@2284,2599 ; C16.1@2284,2491 2297,2491 C15.1@2382,2406
  Top Layer w20: RTC.5@1750,2345 1752,2347 2131,2347 C16.1@2272,2488 ; SD-TF.6@2282,2599 SD-TF.6@2282,2600 ; SD-TF.6@2282,2606 SD-TF.6@2284,2608 ; MPU_HLC.5@2388,2304 2391,2307 C15.1@2391,2407 ; v2@2873,2915 2873,2792 U1.4@2950,2715 ; v2@2876,2915 v2@2884,2915 ; U1.4@2991,2746 U1.4@3001,2736 ; U1.4@3008,2738 U1.4 ; U1.2@3011,2506 3084,2433 C11.1@3084,2376 ; U1.2@3011,2512 U1.2@3012,2513 ; U1.4@3011,2734 U1.4@3019,2742
  Bottom Layer w15: OV7670.2@1409,2022 1414,2027 C17.1@1529,2027 ; C17.1@1535,2023 1535,2125 RTC.5@1748,2338
  Bottom Layer w20: SD-TF.6@2286,2602 2287,2602 2379,2510 2987,2510 v1@3014,2537 ; v2@2879,2913 2880,2912 3452,2912 3560,3020 JP4.1@3566,3020 ; v1@3010,2709 3011,2708 v1@3011,2539 ; C10.1@3085,2378 3131,2378 3168,2341 ; 3169,2339 3169,2318 3360,2127 3441,2127 JP3.1@3534,2034
  other v1: 3084,2380 3012,2537 3012,2701
  other v2: 2877,2917

## Keep-outs
Keep-Out Layer:
  lines w4: 1212,1891 1212,3141 4700,3141 4700,1894 ; 1212,1892 4701,1894

## Text inside footprints (layer, text, board x,y; h text height)
NRF: Top Overlay "2" at 2114,3046 h50 r180; Top Overlay "1" at 2104,2949 h50 r180
OV7670: Top Overlay "1" at 1330,1953 h40 r90; Top Overlay "2" at 1456,1939 h40 r90